# Altium PCB WC_Board_Backup.PcbDoc
Units mil, origin at the board's own origin, x right, y up, seen from the top; angles counter-clockwise.
Board outline 5800 x 3240 mil, 2 copper layers (Top Layer, Bottom Layer); 45 components, 45 nets, 220 pads, 2 vias.
Unrouted connection lines stored in the file: 9.
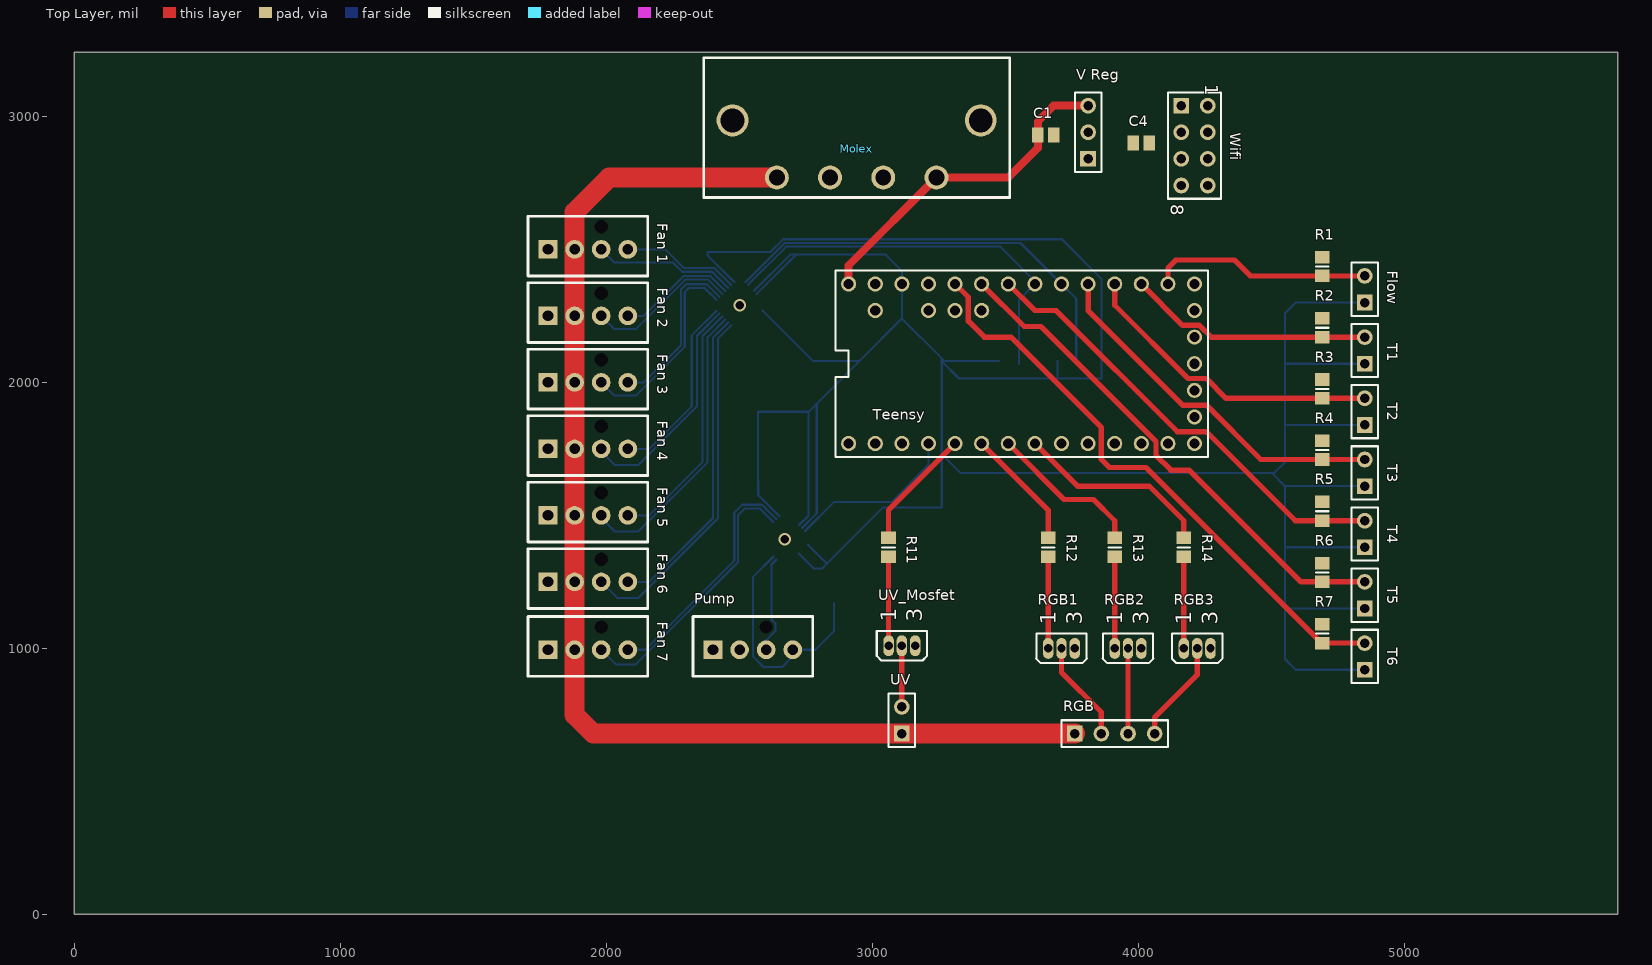
[diagram p0: Top Layer view]
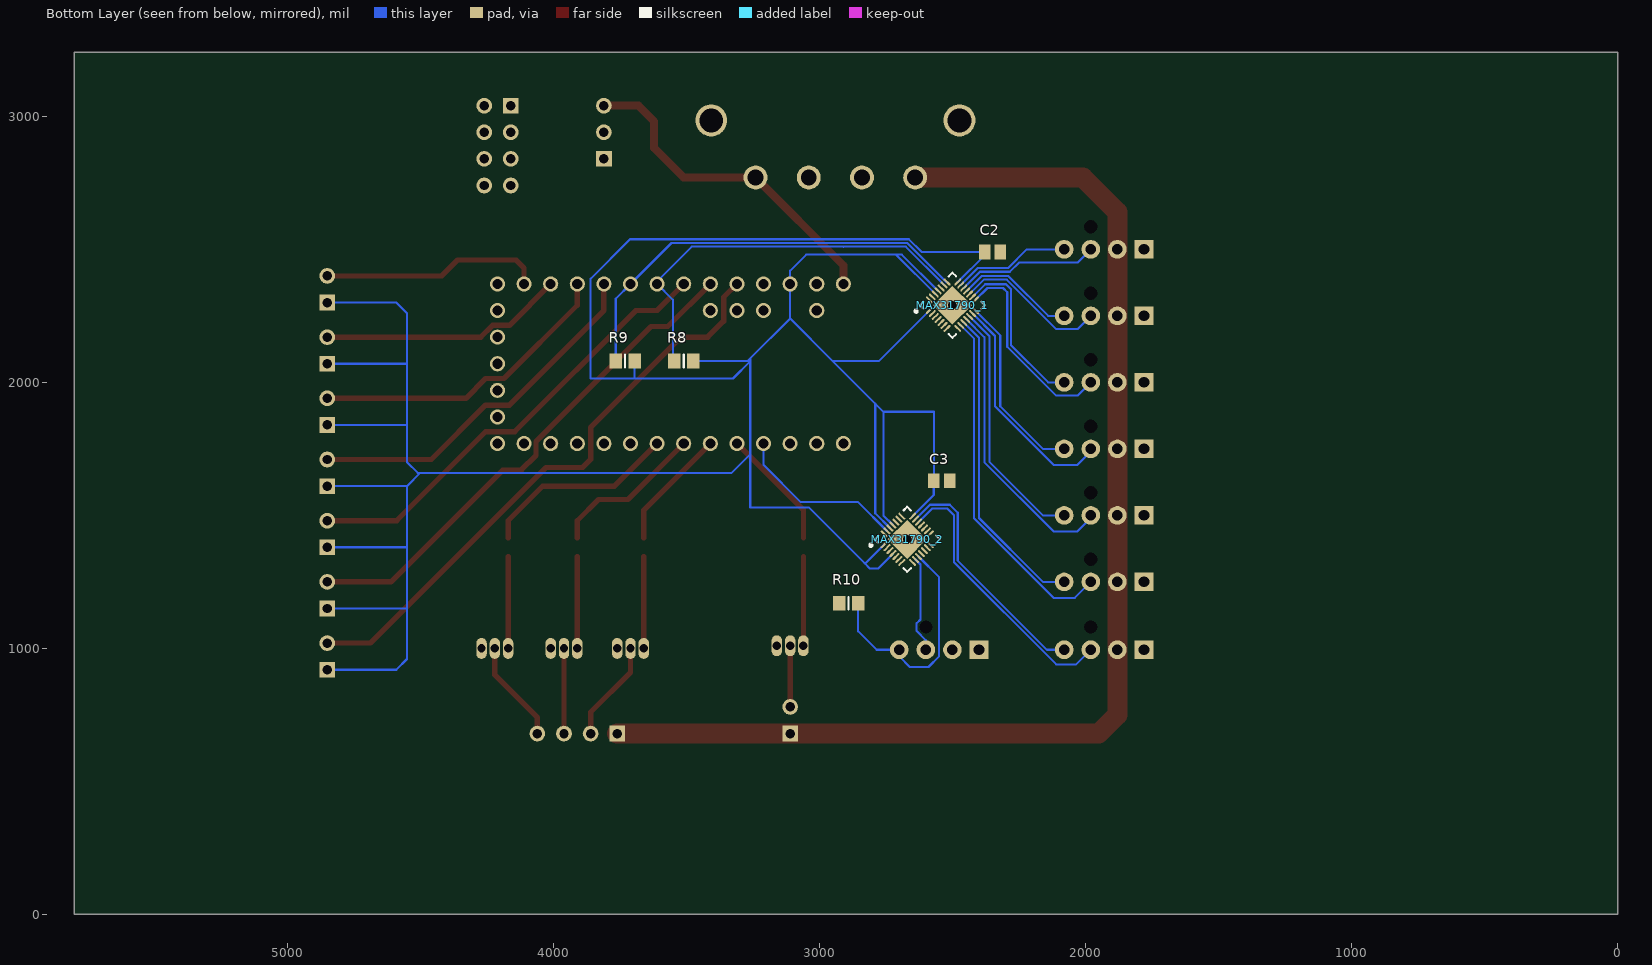
[diagram p1: Bottom Layer view, seen from below]

## Layer stack, top to bottom
Top Solder: solder mask 0.4, Solder Resist, Dk 3.5
Top Layer: signal copper 1.4
Dielectric1: dielectric 12.6, FR-4, Dk 4.8
Bottom Layer: signal copper 1.4
Bottom Solder: solder mask 0.4, Solder Resist, Dk 3.5

## Board outline
0,0 0,1600 0,3240 5800,3240 5800,0

## Design rules (kind name [scope] priority, off if disabled: settings)
BoardOutlineClearance [All] p1: gap=15
Clearance [All] p1: gap=6
FabricationTestPointUsage TestPointUsage [All] p1: valid=0 allowmultiple=FALSE
FabricationTestpoint Testpoint [All] p1: side=3 testpointundercomponent=TRUE minsize=40 maxsize=100 preferedsize=60 minholesize=0 maxholesize=40 preferedholesize=32 testpointgrid=1 allowsidetop=TRUE allowsidebottom=TRUE usegrid=TRUE gridtolerance=0.01
HoleSize [All] p1: absolutevalues=TRUE maxlimit=100 minlimit=13 maxpercent=80.000 minpercent=20.000
MinimumAnnularRing [All] p1: minimumring=7
PolygonConnect [All] p1: connectstyle=Relief reliefconductorwidth=10 reliefentries=4 polygonreliefangle="90 Angle" airgapwidth=10
RoomDefinition WC_Board [InComponentClass('WC_Board')] p1: confinementstyle=ConfineIn formatcopy=TRUE lockcomponents=FALSE outline 1700,620 4910,620 4910,3230 1700,3230
RoutingVias [All] p1: holewidth=28 width=50 viastyle="Through Hole" minholewidth=28 minwidth=50 maxholewidth=28 maxwidth=50
SilkToSolderMaskClearance SilkscreenOverComponentPads [IsPad] p1: minsilkscreentomaskgap=10 clearancetoexposedcopper=TRUE
SolderMaskExpansion [All] p1: expansion=4
Width [All] p1: maxlimit=100 minlimit=6 preferedwidth=8
26 further rules are at their usual default settings.

## Components (designator, comment, footprint, x,y, rotation, side; value= is the part's Value field where it differs from the comment)
C1 "Cap Semi" C0805 3650.47,2930 r0 top
C2 "Cap Semi" C0805 2349.53,2490 r180 bottom
C3 "Cap Semi" C0805 2540,1630 r180 bottom
C4 "Cap Semi" C0805 4009.53,2900 r0 top
"Fan 1" "Fan 1" "Fan Header" 1780,2500 r180 top
"Fan 2" "Fan 2" "Fan Header" 1780,2250 r180 top
"Fan 3" "Fan 3" "Fan Header" 1780,2000 r180 top
"Fan 4" "Fan 4" "Fan Header" 1780,1750 r180 top
"Fan 5" "Fan 5" "Fan Header" 1780,1500 r180 top
"Fan 6" "Fan 6" "Fan Header" 1780,1250 r180 top
"Fan 7" "Fan 7" "Fan Header" 1780,994.96 r180 top
Flow "Flow" HDR1X2 4850,2300 r90 top
MAX31790_1 "MAX31790" QFN40P400X400X80_HS-29N 2500,2290 r135 bottom
MAX31790_2 "MAX31790" QFN40P400X400X80_HS-29N 2670,1410 r135 bottom
Molex "Molex" Molex 2640,2770 r180 top
Pump "Pump" "Fan Header" 2400,994.96 r180 top
R1 "Res3" 6-0805_N 4690,2435.43 r270 top
R2 "Res3" 6-0805_N 4690,2205.43 r270 top
R3 "Res3" 6-0805_N 4690,1975.43 r270 top
R4 "Res3" 6-0805_N 4690,1745.43 r270 top
R5 "Res3" 6-0805_N 4690,1515.43 r270 top
R6 "Res3" 6-0805_N 4690,1285.43 r270 top
R7 "Res3" 6-0805_N 4690,1055.43 r270 top
R8 "Res3" 6-0805_N 3510,2080 r0 bottom
R9 "Res3" 6-0805_N 3730,2080 r0 bottom
R10 "Res3" 6-0805_N 2890,1170 r180 bottom
R11 "Res3" 6-0805_N 3060,1380 r270 top
R12 "Res3" 6-0805_N 3660,1380 r270 top
R13 "Res3" 6-0805_N 3910,1380 r270 top
R14 "Res3" 6-0805_N 4170,1380 r270 top
RGB "RGB" HDR1X4 3760,680 r0 top
RGB1 "MOSFET-N" E3 3710,1000 r90 top
RGB2 "MOSFET-N" E3 3960,1000 r90 top
RGB3 "MOSFET-N" E3 4220,1000 r90 top
T1 "Temp 1" HDR1X2 4850,2070 r90 top (schematic designator "Temp 1")
T2 "Temp 2" HDR1X2 4850,1840 r90 top (schematic designator "Temp 2")
T3 "Temp 3" HDR1X2 4850,1610 r90 top (schematic designator "Temp 3")
T4 "Temp 4" HDR1X2 4850,1380 r90 top (schematic designator "Temp 4")
T5 "Temp 5" HDR1X2 4850,1150 r90 top (schematic designator "Temp 5")
T6 "Temp 6" HDR1X2 4850,920 r90 top (schematic designator "Temp 6")
Teensy "" TEENSY3-ALL_PINS 3560,2070 r90 top
UV "UV" HDR1X2 3110,680 r90 top
UV_Mosfet "MOSFET-N" E3 3110,1010 r90 top
"V Reg" "Header 3" HDR1X3 3810,2840 r90 top (schematic designator "Voltage Regulator")
Wifi "Wifi" HDR2X4 4160,3040 r270 top

## Footprints (in the part's own frame and the unit in brackets; to place one, negate y for a bottom-side part, rotate by r counter-clockwise, add the part's x,y. Pads: shape width x height; smd on the part's side, far side on the other; paste and mask are expansions set on the pad)
6-0805_N [mm] "Chip Resistor, Body 2.0x1.2mm, IPC Medium Density"
  rect 1.2x1.4 smd: 1(-0.9,0) 2(0.9,0)
  silkscreen extent 0,-0.6 0,0.6, body extent -1.07,-0.7 1.07,0.7, height 0.7
C0805 [mm] "Chip Capacitor, Body 2.0x1.3mm, IPC High Density"
  rect 1.1x1.4 smd: 1(-0.75,0) 2(0.75,0)
  body extent -1.1,-0.72 1.1,0.72, height 1.4
E3 [mm] "TO, Flat Index; 3 In-Line, Axial Leads; Body Dia. 4.6mm; Lead Dia. 0.5 mm (max)"
  oval 2x1 hole 0.8: 1(0,1.27) 2(0,0) 3(0,-1.27)
  silkscreen extent -1.41,-2.41 1.41,2.41
"Fan Header" [mil] "4 Pin Fan Header"
  rect 70x70 hole 40: 1(0,0)
  round 70 hole 40: 2(-100,0) 3(-200,0) 4(-300,0)
  round 40 hole 49.21 unplated: 5(-200,-85.04)
  silkscreen extent -375,-125 75,100
HDR1X2 [mm] "Connector; Header; 2 Position"
  rect 1.5x1.5 hole 0.9: 1(0,0)
  round 1.5 hole 0.9: 2(2.54,0)
  silkscreen extent -1.27,-1.27 3.81,1.27
HDR1X3 [mm] "Connector; Header; 3 Position"
  rect 1.5x1.5 hole 0.9: 1(0,0)
  round 1.5 hole 0.9: 2(2.54,0) 3(5.08,0)
  silkscreen extent -1.27,-1.27 6.35,1.27
HDR1X4 [mm] "Connector; Header; 4 Position"
  rect 1.5x1.5 hole 0.9: 1(0,0)
  round 1.5 hole 0.9: 2(2.54,0) 3(5.08,0) 4(7.62,0)
  silkscreen extent -1.27,-1.27 8.89,1.27
HDR2X4 [mm] "Connector; Header; 4x2 Position"
  rect 1.5x1.5 hole 0.9: 1(0,0)
  round 1.5 hole 0.9: 2(0,2.54) 3(2.54,0) 4(2.54,2.54) 5(5.08,0) 6(5.08,2.54) 7(7.62,0) 8(7.62,2.54)
  silkscreen extent -1.27,-1.27 8.89,3.81
Molex [mil] "Molex Header"
  round 120 hole 90: 0(-766.54,-214.57) 0(166.54,-214.57)
  round 90 hole 60: 1(0,0) 2(-200,0) 3(-400,0) 4(-600,0)
  silkscreen extent -875,-450 275,75
QFN40P400X400X80_HS-29N [mm] "QFN, 28-Leads, Body 4.00x4.00mm, Pitch 0.40mm, Thermal Pad 2.64x2.64mm, IPC Medium Density"
  oval 0.85x0.2 smd: 1(-1.925,1.2) 2(-1.925,0.8) 3(-1.925,0.4) 4(-1.925,0) 5(-1.925,-0.4) 6(-1.925,-0.8) 7(-1.925,-1.2) 15(1.925,-1.2) 16(1.925,-0.8) 17(1.925,-0.4) 18(1.925,0) 19(1.925,0.4) 20(1.925,0.8) 21(1.925,1.2)
  oval 0.2x0.85 smd: 8(-1.2,-1.925) 9(-0.8,-1.925) 10(-0.4,-1.925) 11(0,-1.925) 12(0.4,-1.925) 13(0.8,-1.925) 14(1.2,-1.925) 22(1.2,1.925) 23(0.8,1.925) 24(0.4,1.925) 25(0,1.925) 26(-0.4,1.925) 27(-0.8,1.925) 28(-1.2,1.925)
  rect 2.64x2.64 smd: 29(0,0)
  silkscreen extent -2.97,-2.2 2.2,2.2, body extent -2.05,-2.05 2.05,2.05, height 0.8
TEENSY3-ALL_PINS [mil]
  round 57 hole 38: 0(-300,550) 1(-300,450) 2(-300,350) 3(-300,250) 3.3V(300,450) 3.3V1(-100,-650) 4(-300,150) 5(-300,50) 6(-300,-50) 7(-300,-150) 8(-300,-250) 9(-300,-350) 10(-300,-450) 11(-300,-550) 12(-300,-650) 13(300,-650) 14/A0(300,-550) 15/A1(300,-450) 16/A2(300,-350) 17/A3(300,-250) 18/A4(300,-150) 19/A5(300,-50) 20/A6(300,50) 21/A7(300,150) 22/A8(300,250) 23/A9(300,350) A10(200,250) A11(200,150) AGND(300,550) AREF(200,350) GND(-300,650) GND1(0,-650) PGM(100,-650) RESET/DAC(200,-650) VBAT(-200,-650) VIN(300,650) VUSB(200,550)
  silkscreen extent -350,-700 350,700

## Part data
C1 C2 C3 C4: "Capacitor (Semiconductor SIM Model)"
"Fan 1" "Fan 2" "Fan 3" "Fan 4" "Fan 5" "Fan 6" "Fan 7" Molex Pump: library part Component_1
Flow T1 T2 T3 T4 T5 T6 UV: library part "Header 2", "Header, 2-Pin"
R1 R2 R3 R4 R5 R6 R7 R8 R9 R10 R11 R12 R13 R14: "Resistor"
RGB: library part "Header 4", "Header, 4-Pin"
RGB1 RGB2 RGB3 UV_Mosfet: "N-Channel MOSFET"
Teensy: library part TEENSY_3.0_ALL_PINS
"V Reg": "Header, 3-Pin"
Wifi: library part "Header 4X2", "Header, 4-Pin, Dual row"

## Via types
v1: diameter 47.24, hole 31.5, Top Layer to Bottom Layer, 2 vias

## Nets (pads, with @x,y where several pads share a name; then routed paths per layer and width w, separated by ;. In a path a pad name is that pad's centre, name@x,y a point inside that pad or via, vN(x,y) a via of type N, cw(c..) or ccw(c..) an arc to the next point about the centre after c; other vN are vias at no path point)
3.3V: C2.1 C3.1 Flow.1 MAX31790_1.1 MAX31790_1.21 MAX31790_1.25 MAX31790_1.26 MAX31790_2.1 MAX31790_2.4 MAX31790_2.21 MAX31790_2.25 MAX31790_2.26 R8.1 R9.1 T1.1 T2.1 T3.1 T4.1 T5.1 T6.1 Teensy.3.3V | length 12856.1
  Bottom Layer w8: MAX31790_1.21 2379.06,2477.76 C2.1 2615.86,2490 2663.86,2538 3712,2538 3860,2390 3860,2014.57 3630,2014.57 ; MAX31790_1.25 2690,2480 2710,2480 ; MAX31790_1.26 2710,2477.73 2710,2480 ; MAX31790_1.1 2776.81,2080 2950,2080 ; MAX31790_2.21 2570,1576.81 2570,1629.53 C3.1 2569.53,1889.53 2759.53,1889.53 ; MAX31790_2.4 2780,1300 2810,1300 2830,1320 ; MAX31790_2.25 2759.53,1499.53 2759.53,1889.53 ; MAX31790_2.26 2790,1507.73 2790,1920 ; MAX31790_2.1 2826.81,1320 2830,1320 ; R8.1 3270,2080 3260,2090 ; R9.1 3694.57,2014.57 3630,2014.57 ; T6.1 4590,920 4550,960 4550,1150 ; T5.1 4550,1150 ; T4.1 4550,1380 ; T3.1 4550,1610 ; T2.1 4550,1840 ; T1.1 4550,2070 ; Flow.1 4590,2300 4550,2260 4550,2070 ; 2710,2480 3050,2480 3110,2420 Teensy.3.3V 3110,2240 ; 2759.53,1889.53 2950,2080 ; 2830,1320 3040,1530 3260,1530 3260,1730 ; 2950,2080 3110,2240 ; 3110,2240 3260,2090 ; 3260,1730 3330,1660 4500,1660 ; 3260,1730 3260,2079.13 ; 3260,2079.13 3324.57,2014.57 3630,2014.57 ; 3260,2079.13 3260,2090 ; 4500,1660 4550,1610 ; 4500,1660 4510,1660 4550,1700 4550,1840 ; 4550,1150 4550,1380 ; 4550,1380 4550,1610 ; 4550,1840 4550,2070
3.3V_2: "V Reg.2" C4.1 Wifi.3 Wifi.7
5V: "V Reg.3" C1.1 Molex.4 R10.1 Teensy.VIN | length 1277.1
  Top Layer w30: Teensy.VIN 2910,2440 Molex.4 3510,2770 3620.94,2880.94 C1.1 3620.94,2980.94 3680,3040 3810,3040
12V: "Fan 1.2" "Fan 2.2" "Fan 3.2" "Fan 4.2" "Fan 5.2" "Fan 6.2" "Fan 7.2" Molex.1 RGB.1 UV.1 | length 4612.8
  Top Layer w75: Molex.1 2010,2770 1880,2640 1880,2500 1880,2250 1880,2000 1880,1750 1880,1500 1880,1250 1880,994.96 1880,750 1950,680 UV.1 RGB.1
GND: "Fan 1.1" "Fan 2.1" "Fan 3.1" "Fan 4.1" "Fan 5.1" "Fan 6.1" "Fan 7.1" "V Reg.1" C1.2 C2.2 C3.2 C4.2 MAX31790_1.2 MAX31790_1.3 MAX31790_1.4 MAX31790_1.5 MAX31790_1.7 MAX31790_1.8 MAX31790_1.29 MAX31790_2.2 MAX31790_2.3 MAX31790_2.5 MAX31790_2.7 MAX31790_2.8 MAX31790_2.29 Molex.2 Molex.3 R1.1 R2.1 R3.1 R4.1 R5.1 R6.1 R7.1 RGB1.3 RGB2.3 RGB3.3 Teensy.AGND Teensy.GND UV_Mosfet.3 Wifi.2
  other v1: 2670,1410 2500,2290
"NetFan 1_3": "Fan 1.3" MAX31790_1.19 | length 537.7
  Bottom Layer w8: 1980,2500 2030,2450 2250,2450 2284,2416 2396.27,2416 MAX31790_1.19
"NetFan 1_4": "Fan 1.4" MAX31790_1.20 | length 444.2
  Bottom Layer w8: 2080,2500 2220,2500 2290,2430 2404.54,2430 MAX31790_1.20
"NetFan 2_3": "Fan 2.3" MAX31790_1.17 | length 575.2
  Bottom Layer w8: 1980,2250 2030,2200 2109.8,2200 2295.8,2386 2381.73,2386 MAX31790_1.17
"NetFan 2_4": "Fan 2.4" MAX31790_1.18 | length 451.9
  Bottom Layer w8: 2080,2250 2140,2250 2290,2400 2390,2400 MAX31790_1.18
"NetFan 3_3": "Fan 3.3" MAX31790_1.15 | length 760.1
  Bottom Layer w8: 1980,2000 2030,1950 2110,1950 2294,2134 2294,2338.97 2310,2354.97 2368.22,2354.97 MAX31790_1.15
"NetFan 3_4": "Fan 3.4" MAX31790_1.16 | length 640
  Bottom Layer w8: 2080,2000 2140,2000 2280,2140 2280,2350.4 2298.56,2368.97 2376.49,2368.97 MAX31790_1.16
"NetFan 4_3": "Fan 4.3" MAX31790_1.13 | length 865.4
  Bottom Layer w8: 1980,1750 1980,1740 2030,1690 2120,1690 2340,1910 2340,2174.54 MAX31790_1.13
"NetFan 4_4": "Fan 4.4" MAX31790_1.14 | length 704.6
  Bottom Layer w8: 2080,1750 2160,1750 2320,1910 2320,2176.81 MAX31790_1.14
"NetFan 5_3": "Fan 5.3" MAX31790_1.11 | length 1102.3
  Bottom Layer w8: 1980,1500 1980,1490 2030,1440 2120,1440 2380,1700 2380,2170 MAX31790_1.11
"NetFan 5_4": "Fan 5.4" MAX31790_1.12 | length 941.6
  Bottom Layer w8: 2080,1500 2160,1500 2360,1700 2360,2172.27 MAX31790_1.12
"NetFan 6_3": "Fan 6.3" MAX31790_1.9 | length 1333.3
  Bottom Layer w8: 1980,1250 2040,1190 2119.8,1190 2418.35,1488.55 2418.35,2163.8 MAX31790_1.9
"NetFan 6_4": "Fan 6.4" MAX31790_1.10 | length 1178.5
  Bottom Layer w8: 2080,1250 2160,1250 2400,1490 2400,2167.73 MAX31790_1.10
"NetFan 7_3": "Fan 7.3" MAX31790_2.19 | length 1037.4
  Bottom Layer w8: 1980,994.96 2034.96,940 2110,940 2494,1324 2494,1500 2520,1526 2576.27,1526 MAX31790_2.19
"NetFan 7_4": "Fan 7.4" MAX31790_2.20 | length 912.4
  Bottom Layer w8: 2080,994.96 2145.04,994.96 2480,1329.92 2480,1510 2510,1540 2584.54,1540 MAX31790_2.20
NetFlow_2: Flow.2 R1.2 Teensy.14/A0 | length 837.3
  Top Layer w20: Teensy.14/A0 4110,2430 4140,2460 4360,2460 4420,2400 R1.2 Flow.2
NetMAX31790_1_22: MAX31790_1.22 MAX31790_2.22 R9.2 Teensy.18/A4 | length 1627.5
  Bottom Layer w8: MAX31790_1.22 2522.66,2377 2669.66,2524 3556,2524 Teensy.18/A4 3765.43,2314.57 R9.2
NetMAX31790_1_23: MAX31790_1.23 MAX31790_2.23 R8.2 Teensy.19/A5 | length 1527.6
  Bottom Layer w8: MAX31790_1.23 2675.46,2510 2910,2510 ; 2910,2509.08 2910,2510 ; R8.2@3550.87,2070 3550.87,2310.87 Teensy.19/A5 3610,2380 3480,2510 2910,2510
NetMAX31790_1_27: MAX31790_1.27 MAX31790_2.27 Teensy.2 | length 647.1
  Bottom Layer w8: MAX31790_2.27 2854.54,1550 3070,1550 3210,1690 Teensy.2
NetMAX31790_2_9: MAX31790_2.9 Pump.3 | length 367.3
  Bottom Layer w8: Pump.3 2600,1031.06 2634.61,1065.67 2634.61,1094.33 2620,1108.94 2620,1315.46 MAX31790_2.9
NetMAX31790_2_10: MAX31790_2.10 Pump.4 R10.2 | length 904.3
  Bottom Layer w8: MAX31790_2.10 2550,1267.73 2550,970 2590,930 2660,930 2700,970 Pump.4 2784.96,994.96 2854.57,1064.57 R10.2
NetR2_2: R2.2 T1.2 Teensy.15/A1 | length 922.8
  Top Layer w20: Teensy.15/A1 4165.5,2214.5 4228.43,2214.5 4272.93,2170 R2.2 T1.2
NetR3_2: R3.2 T2.2 Teensy.16/A2 | length 1165
  Top Layer w20: Teensy.16/A2 3910,2290 4185.5,2014.5 4254.5,2014.5 4329,1940 R3.2 T2.2
NetR4_2: R4.2 T3.2 Teensy.17/A3 | length 1372
  Top Layer w20: Teensy.17/A3 3810,2270 4165.5,1914.5 4254.5,1914.5 4459,1710 R4.2 T3.2
NetR5_2: R5.2 T4.2 Teensy.20/A6 | length 1708.7
  Top Layer w20: Teensy.20/A6 3610,2270 3690,2270 4145.5,1814.5 4254.5,1814.5 4589,1480 R5.2 T4.2
NetR6_2: R6.2 T5.2 Teensy.21/A7 | length 1934.3
  Top Layer w20: Teensy.21/A7 3570,2210 3632.93,2210 4065.5,1777.43 4065.5,1725.5 4121,1670 4190,1670 4610,1250 R6.2 T5.2
NetR7_2: R7.2 T6.2 Teensy.22/A8 | length 2222.2
  Top Layer w20: Teensy.22/A8 3360,2320 3360,2230 3420,2170 3520,2170 3860,1830 3860,1710 3890,1680 4027.06,1680 4687.06,1020 R7.2 T6.2
NetR11_1: R11.1 Teensy.3 | length 458.1
  Top Layer w20: R11.1 3060,1520 Teensy.3
NetR11_2: R11.2 UV_Mosfet.1 | length 334.6
  Top Layer w20: UV_Mosfet.1 R11.2
NetR12_1: R12.1 Teensy.4 | length 458.1
  Top Layer w20: Teensy.4 3660,1520 R12.1
NetR12_2: R12.2 RGB1.1 | length 344.6
  Top Layer w20: RGB1.1 R12.2
NetR13_1: R13.1 Teensy.5 | length 584.7
  Top Layer w20: Teensy.5 3720,1560 3830,1560 3910,1480 R13.1
NetR13_2: R13.2 RGB2.1 | length 344.6
  Top Layer w20: RGB2.1 R13.2
NetR14_1: R14.1 Teensy.6 | length 744.7
  Top Layer w20: Teensy.6 3770,1610 4040,1610 4170,1480 R14.1
NetR14_2: R14.2 RGB3.1 | length 344.6
  Top Layer w20: RGB3.1 R14.2
NetRGB1_1: RGB1.2 RGB.2 | length 382.1
  Top Layer w20: RGB1.2 3710,910 3860,760 RGB.2
NetRGB2_1: RGB2.2 RGB.3 | length 320
  Top Layer w20: RGB.3 RGB2.2
NetRGB3_1: RGB3.2 RGB.4 | length 386.3
  Top Layer w20: RGB.4 4060,740 4220,900 RGB3.2
NetTeensy_9: Teensy.9 Wifi.1
NetTeensy_10: Teensy.10 Wifi.8
NetUV_2: UV.2 UV_Mosfet.2 | length 230
  Top Layer w20: UV.2 UV_Mosfet.2
pads on no net: "Fan 1.5" "Fan 2.5" "Fan 3.5" "Fan 4.5" "Fan 5.5" "Fan 6.5" "Fan 7.5" MAX31790_1.6 MAX31790_1.24 MAX31790_1.28 MAX31790_2.6 MAX31790_2.11 MAX31790_2.12 MAX31790_2.13 MAX31790_2.14 MAX31790_2.15 MAX31790_2.16 MAX31790_2.17 MAX31790_2.18 MAX31790_2.24 MAX31790_2.28 Molex.0 Pump.1 Pump.2 Pump.5 Teensy.0 Teensy.1 Teensy.3.3V1 Teensy.7 Teensy.8 Teensy.11 Teensy.12 Teensy.13 Teensy.23/A9 Teensy.A10 Teensy.A11 Teensy.AREF Teensy.GND1 Teensy.PGM Teensy.RESET/DAC Teensy.VBAT Teensy.VUSB Wifi.4 Wifi.5 Wifi.6

## Silkscreen, mask and mechanical layers (free items; w line width, h text height)
Mechanical 16:
  drawing of 1872 lines, arcs and shapes, not listed
  text "1" at -1153,5335 h70
  text "2" at 1707,5335 h70
  text "3" at 4587,5335 h70
  text "4" at 7457,5335 h70
  text "A" at -2505,4429 h70
  text "A" at 8795,4429 h70
  text "B" at -2505,2537 h70
  text "B" at 8795,2537 h70
  text "C" at -2505,627 h70
  text "ENGINEER:" at 4270,-830 h45
  text "TITLE:" at 5770,-830 h45
  text "PCB DESIGNER:" at 4270,-1125 h45
  text "D" at -2505,-1263 h70
  text "D" at 8795,-1263 h70
  text "DATE:" at 4270,-1430 h45
  text "PART NO.:" at 5770,-1430 h45
  text "REV:" at 7870,-1430 h45
  text "Altium Limited" at 2970,-1530 h70
  text ".PRINT_DATE" at 4320,-1550 h70
  text "12a Rodborough Rd" at 2970,-1630 h70
  text "Frenchs Forest" at 2970,-1730 h70
  text "FILE NAME:" at 4270,-1730 h45
  text "DWG NO:" at 5770,-1730 h45
  text "SCALE:" at 7870,-1730 h45
  text "NSW 2086" at 2970,-1830 h70
  text ".PCB_FILE_NAME_NO_PATH" at 4320,-1850 h70
  text "1" at -1153,-2065 h70
  text "2" at 1707,-2065 h70
  text "3" at 4587,-2065 h70
  text "4" at 7457,-2065 h70

## Text inside footprints (layer, text, board x,y; h text height)
RGB1: Top Overlay "3" at 3787.28,1089.57 h59.05 r90; Top Overlay "1" at 3688.15,1089.57 h59.05 r90
RGB2: Top Overlay "3" at 4037.28,1089.57 h59.05 r90; Top Overlay "1" at 3938.15,1089.57 h59.05 r90
RGB3: Top Overlay "3" at 4297.28,1089.57 h59.05 r90; Top Overlay "1" at 4198.15,1089.57 h59.05 r90
UV_Mosfet: Top Overlay "3" at 3187.28,1099.57 h59.05 r90; Top Overlay "1" at 3088.15,1099.57 h59.05 r90
Wifi: Top Overlay "1" at 4250,3120 h50 r270; Top Overlay "8" at 4120,2670 h50 r270